# Altium PCB 20-Zigbee.PcbDoc
Units mm, origin at the board's own origin, x right, y up, seen from the top; angles counter-clockwise.
Board outline 40 x 40 mm, 4 copper layers (Top Layer, Internal Plane 1, Internal Plane 2, Bottom Layer), stack 0.462 mm thick; 10 components, 14 nets, 42 pads, 0 vias.
Unrouted connection lines stored in the file: 28.
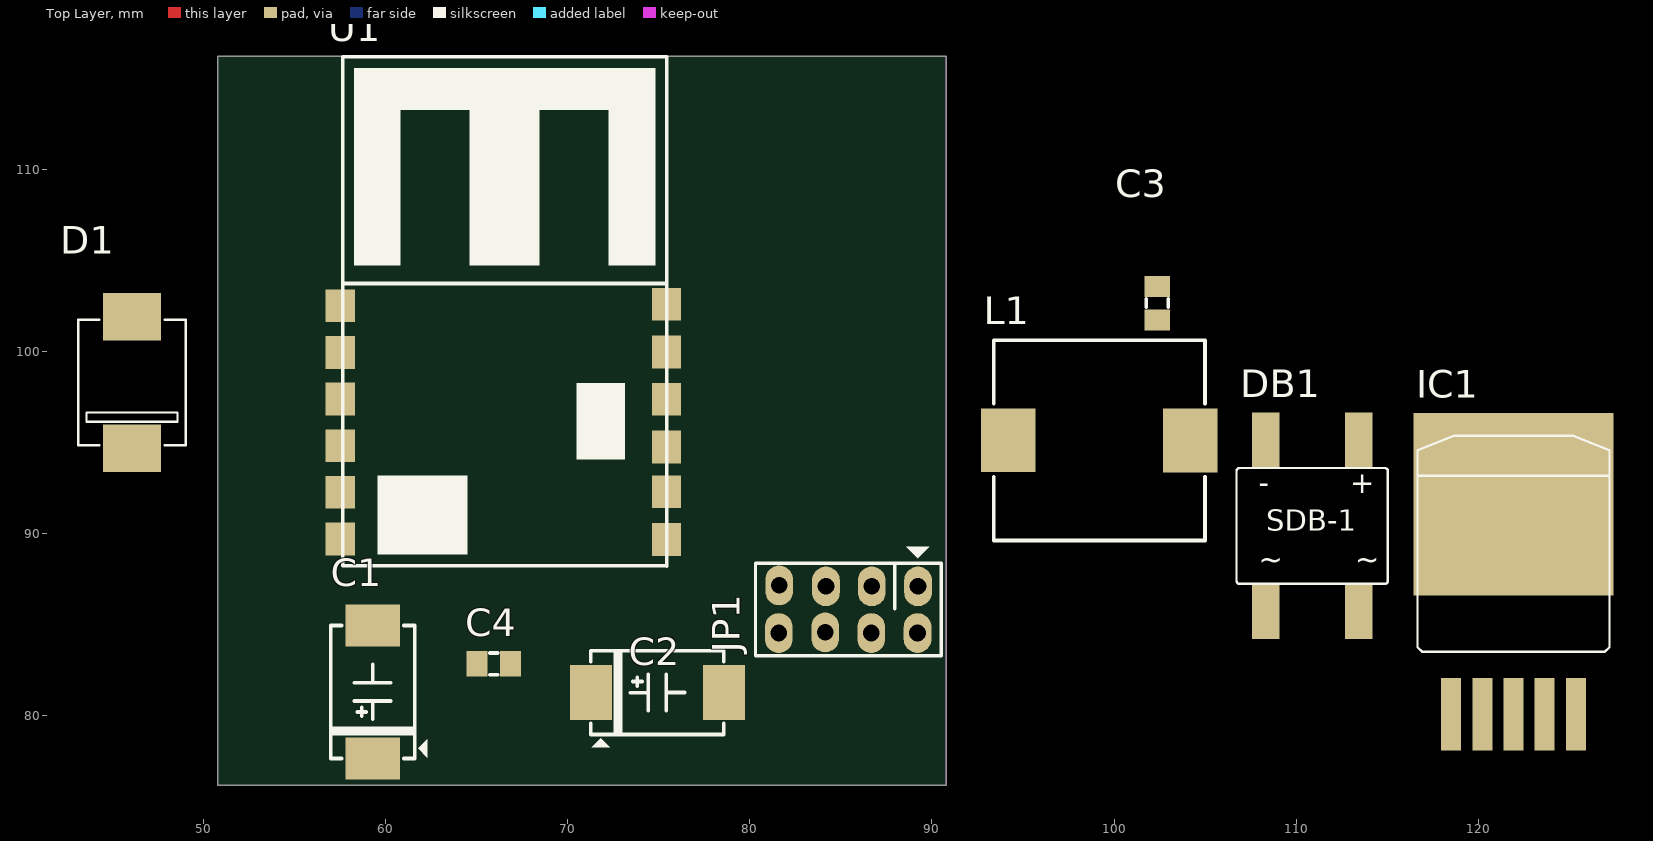
[diagram p0: Top Layer view]
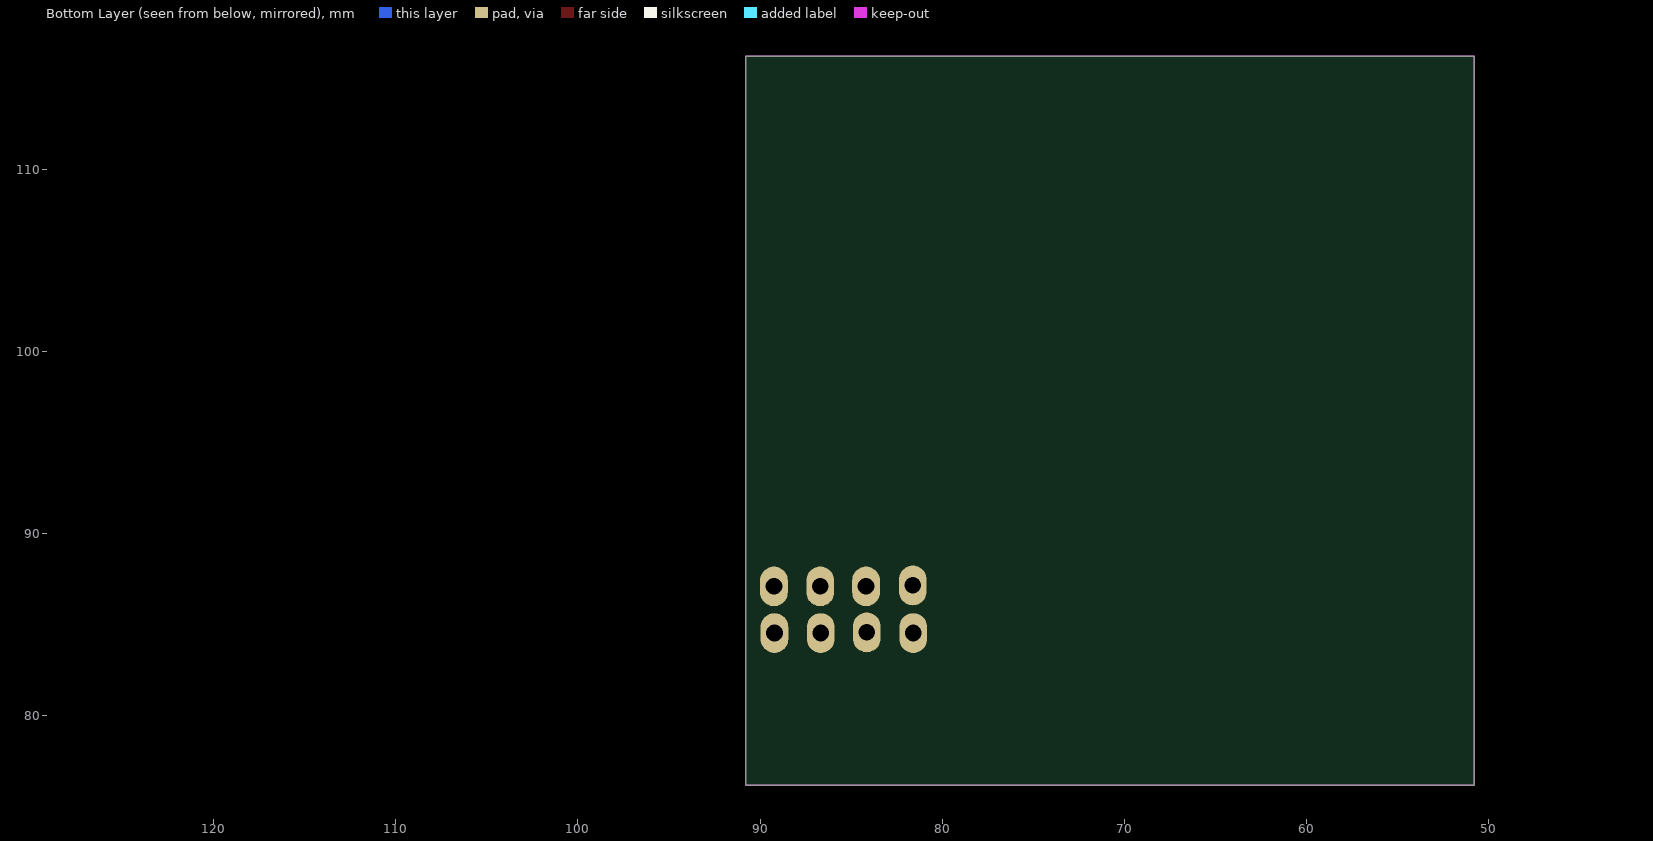
[diagram p1: Bottom Layer view, seen from below]
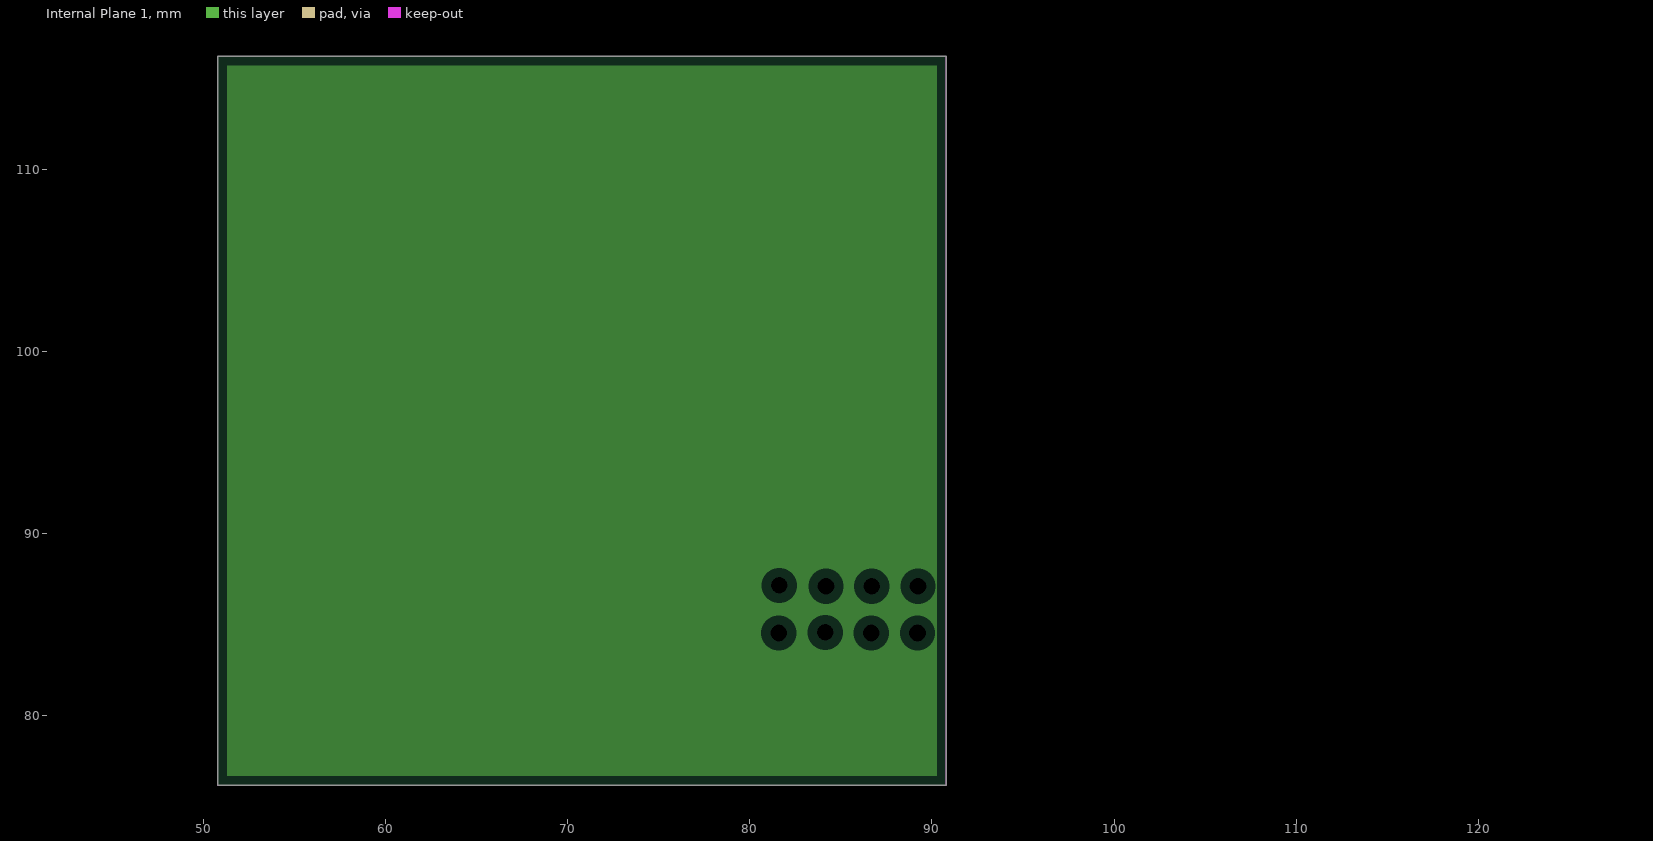
[diagram p2: Internal Plane 1, clearances drawn from the general rule]
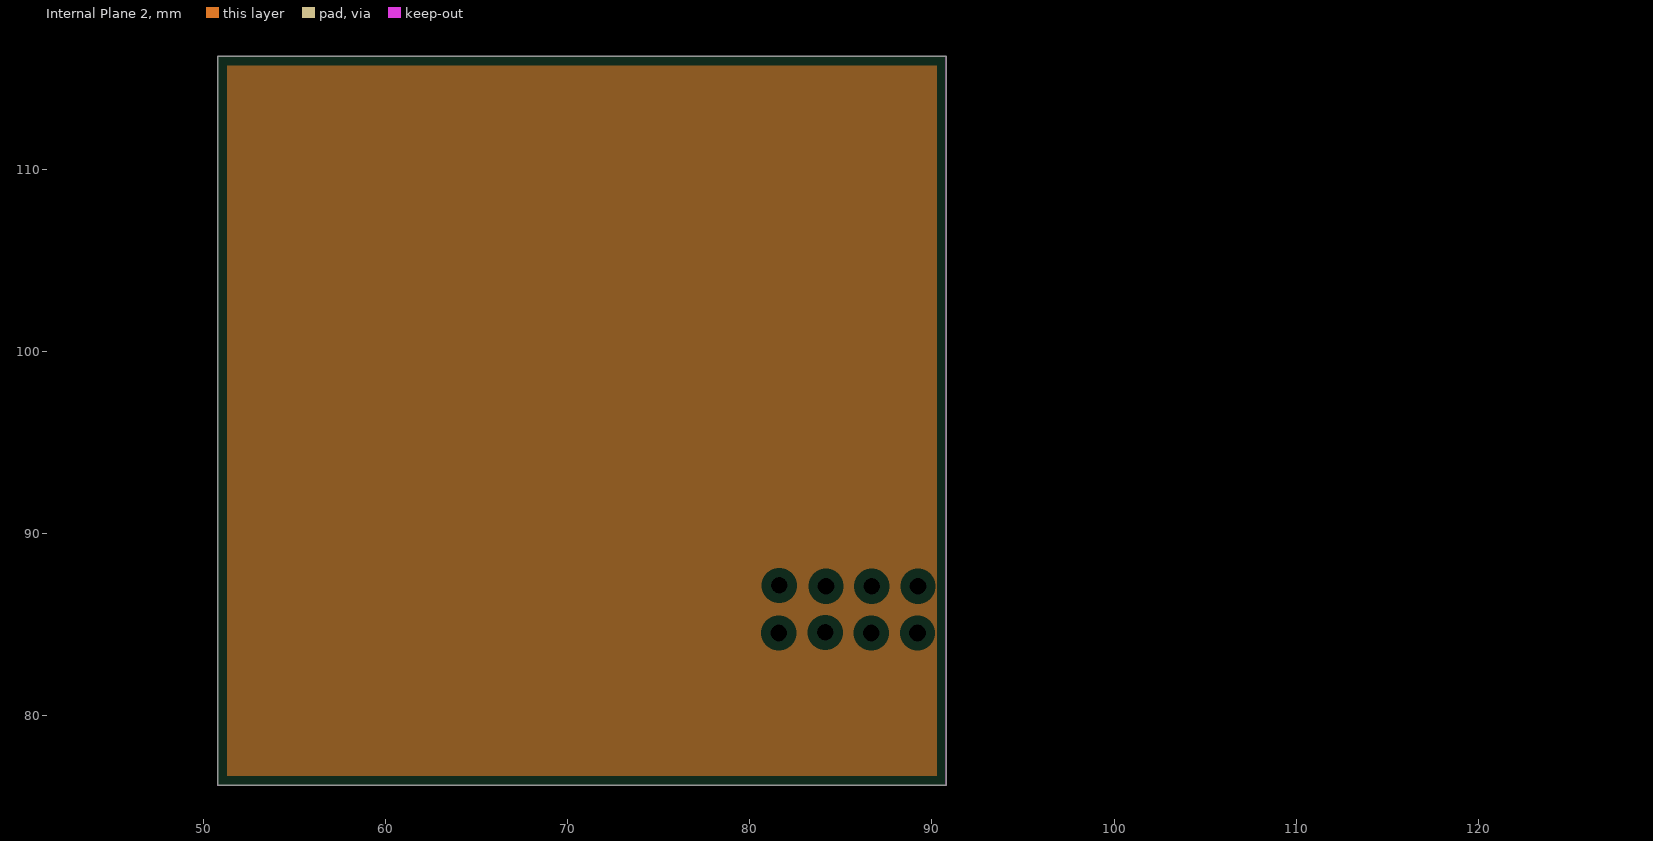
[diagram p3: Internal Plane 2, clearances drawn from the general rule]

## Layer stack, top to bottom
Top Solder: solder mask 0.0102, Solder Resist, Dk 3.5
Top Layer: signal copper 0.0356
Internal Plane 1: plane copper 0.0356
Internal Plane 2: plane copper 0.0356
Dielectric 1: dielectric 0.32, FR-4, Dk 4.8
Bottom Layer: signal copper 0.0356
Bottom Solder: solder mask 0.0102, Solder Resist, Dk 3.5

## Board outline
50.8,76.2 90.8,76.2 90.8,116.2 50.8,116.2

## Design rules (kind name [scope] priority, off if disabled: settings)
Clearance [All] p1: gap=0.2
PlaneClearance [All] p1: clearance=0.508
PlaneConnect [All] p1: planeconnectstyle=Relief reliefexpansion=0.508 reliefentries=4 reliefconductorwidth=0.254 reliefairgap=0.254
PolygonConnect [All] p1: connectstyle=Relief reliefconductorwidth=0.254 reliefentries=4 polygonreliefangle="90 Angle" airgapwidth=0.254
RoutingVias [All] p1: holewidth=0.6 width=1 viastyle="Through Hole" minholewidth=0.711 minwidth=1.27 maxholewidth=0.711 maxwidth=1.27
SolderMaskExpansion [All] p1: expansion=0.102
Width [All] p1: maxlimit=0.2 minlimit=0.2 preferedwidth=0.2
28 further rules are at their usual default settings.

## Classes and differential pairs
component class MRF24J40MA: C1 C2 C3 C4 D1 DB1 IC1 L1

## Components (designator, comment, footprint, x,y, rotation, side; value= is the part's Value field where it differs from the comment)
C1 "470uF" C-TANT-7343-31-CASEA 59.309,81.313 r90 top
C2 "470uF" C-TANT-7343-31-CASEA 74.93,81.28 r0 top
C3 "104" C-0805 102.362,102.652 r90 top
C4 "104" C-0805 65.953,82.848 r0 top
D1 "1N5822" D-DO214-AB 46.101,98.298 r0 top
DB1 "Diode Brideg" D-DB-1A-SMD 110.871,90.424 r0 top
IC1 "LM2576 5V" TO-263-5L 121.92,85.852 r0 top
JP1 "Connector 4x2" JP4x2 85.416,85.852 r180 top
L1 "150mH" L-SMD-10x10 99.187,95.123 r0 top
U1 "MRF24J40MA" MRF24J40 79.883,107.92 r0 top

## Footprints (in the part's own frame and the unit in brackets; to place one, negate y for a bottom-side part, rotate by r counter-clockwise, add the part's x,y. Pads: shape width x height; smd on the part's side, far side on the other; paste and mask are expansions set on the pad)
C-0805 [mm] "Chip Capacitor, 2-Leads, Body 2.0x1.3mm, IPC Medium Density"
  rect 1.15x1.4 smd: 1(-0.925,0) 2(0.925,0)
  silkscreen extent -0.22,-0.6 0.23,0.6, body extent -1,-0.63 1,0.63, height 0.5
C-TANT-7343-31-CASEA [mm] "Tantalium Capacitor 7343-31"
  rect 2.3x3 smd: 1(-3.65,0) 2(3.65,0)
  silkscreen extent -3.65,-3 3.65,2.3, body extent -3.8,-2.3 3.8,2.3, height 3.1
D-DB-1A-SMD [mm] "DB106S"
  rect 1.5x3 smd: 1(-2.55,-4.713) 2(2.55,-4.713) 3(2.55,4.713) 4(-2.55,4.713)
  silkscreen extent -4.15,-3.18 4.15,3.18, body extent -4.15,-4.95 4.15,4.95, height 3.35
D-DO214-AB [mm]
  rect 3.2x2.6 smd: 1(0,3.6) 2(0,-3.6)
  silkscreen extent -2.95,-3.44 2.95,3.44, body extent -2.95,-3.81 2.95,3.82, height 2.4
JP4x2 [mil] "Connector 4x2"
  oval 60x86 hole 36: 1(-150.5,-49.5) 2(-50.5,-49.5) 3(48.5,-49.5) 4(149.5,-51.5) 5(-149.5,51.5) 6(-49.5,51.5) 7(50,50) 8(150.5,51.5)
  silkscreen extent -200,-135 200,101, body extent -197,-100 203,100, height 335
L-SMD-10x10 [mm] "SMD Inductor X-Size = Y-Size = 10mm"
  rect 3x3.5 smd: 1(-5,0) 2(5,-0.015)
  silkscreen extent -5.8,-5.5 5.8,5.5, body extent -5.61,-5.51 5.59,5.49, height 4.05
MRF24J40 [mm]
  rect 1.6x1.8 smd: 1(-22.352,-5.41) 2(-22.352,-7.971) 3(-22.352,-10.531) 4(-22.352,-13.091) 5(-22.352,-15.651) 6(-22.352,-18.212) 7(-4.445,-18.237) 8(-4.445,-15.621) 9(-4.445,-13.157) 10(-4.445,-10.541) 11(-4.445,-7.95) 12(-4.445,-5.334)
  silkscreen extent -22.22,-19.71 -4.44,8.25, body extent -22.22,-19.71 -4.44,8.23, height 3.27
TO-263-5L [mm]
  rect 1.1x4 smd: 1(-3.42,-5.765) 2(-1.71,-5.765) 3(0,-5.765) 4(1.71,-5.765) 5(3.42,-5.765)
  rect 11x10 smd: HM(0,5.765)
  silkscreen extent -5.27,-2.33 5.27,9.52, body extent -5.27,-6.3 5.27,9.52, height 4.95

## Part data
C1 C2: library part CP1, "Cap P  0,1uF < 22uF , 16 - 50V"
C3 C4: library part CN
D1: library part D1A, "Diode 1A"
DB1: library part DB, "Convert AC to DC voltage, 4 pin"
IC1: library part LM2576, "LM2576"
JP1: library part JP4x2
L1: library part L1, "Inductor"

## Nets (pads, with @x,y where several pads share a name; then routed paths per layer and width w, separated by ;. In a path a pad name is that pad's centre, name@x,y a point inside that pad or via, vN(x,y) a via of type N, cw(c..) or ccw(c..) an arc to the next point about the centre after c; other vN are vias at no path point)
+3V3: C2.1 C4.2 IC1.4 L1.2 U1.10
+12V: C1.1 C3.2 DB1.3 IC1.1
CS: JP1.6 U1.8
GND: C1.2 C2.2 C3.1 C4.1 D1.1 DB1.4 IC1.3 IC1.5 IC1.HM U1.1 U1.11 U1.12
INT: JP1.3 U1.4
NC: JP1.5 U1.9
NetCN1_1: DB1.2
NetCN2_1: DB1.1
NetD1_2: D1.2 IC1.2 L1.1
RST: JP1.1 U1.2
SCK: JP1.8 U1.6
SDI: JP1.4 U1.5
SDO: JP1.7 U1.7
WAKE: JP1.2 U1.3

## Keep-outs
Keep-Out Layer:
  the board outline again, w0

## Dimensions
50.8,76.2 to 50.8,116.2 on Mechanical 1
50.8,76.2 to 90.8,76.2 on Mechanical 1

## Text inside footprints (layer, text, board x,y; h text height)
DB1: Top Overlay "~        ~" at 107.95,87.63 h2; Top Overlay "-         +" at 107.95,91.821 h2; Top Overlay "SDB-1" at 108.363,89.784 h2